# Altium PCB main.PcbDoc (part 6 of 8)
Units mil, origin at the board's own origin, x right, y up, seen from the top; angles counter-clockwise.
Board outline 3385.83 x 2362.2 mil, 8 copper layers (L1 (SIG), L2 (GND), L3 (SIG), L4 (GND), L5 (PWR), L6 (SIG), L7 (GND), L8 (SIG)), stack 46.958 mil thick; 318 components, 288 nets, 1482 pads, 1056 vias.
Unrouted connection lines stored in the file: 7.
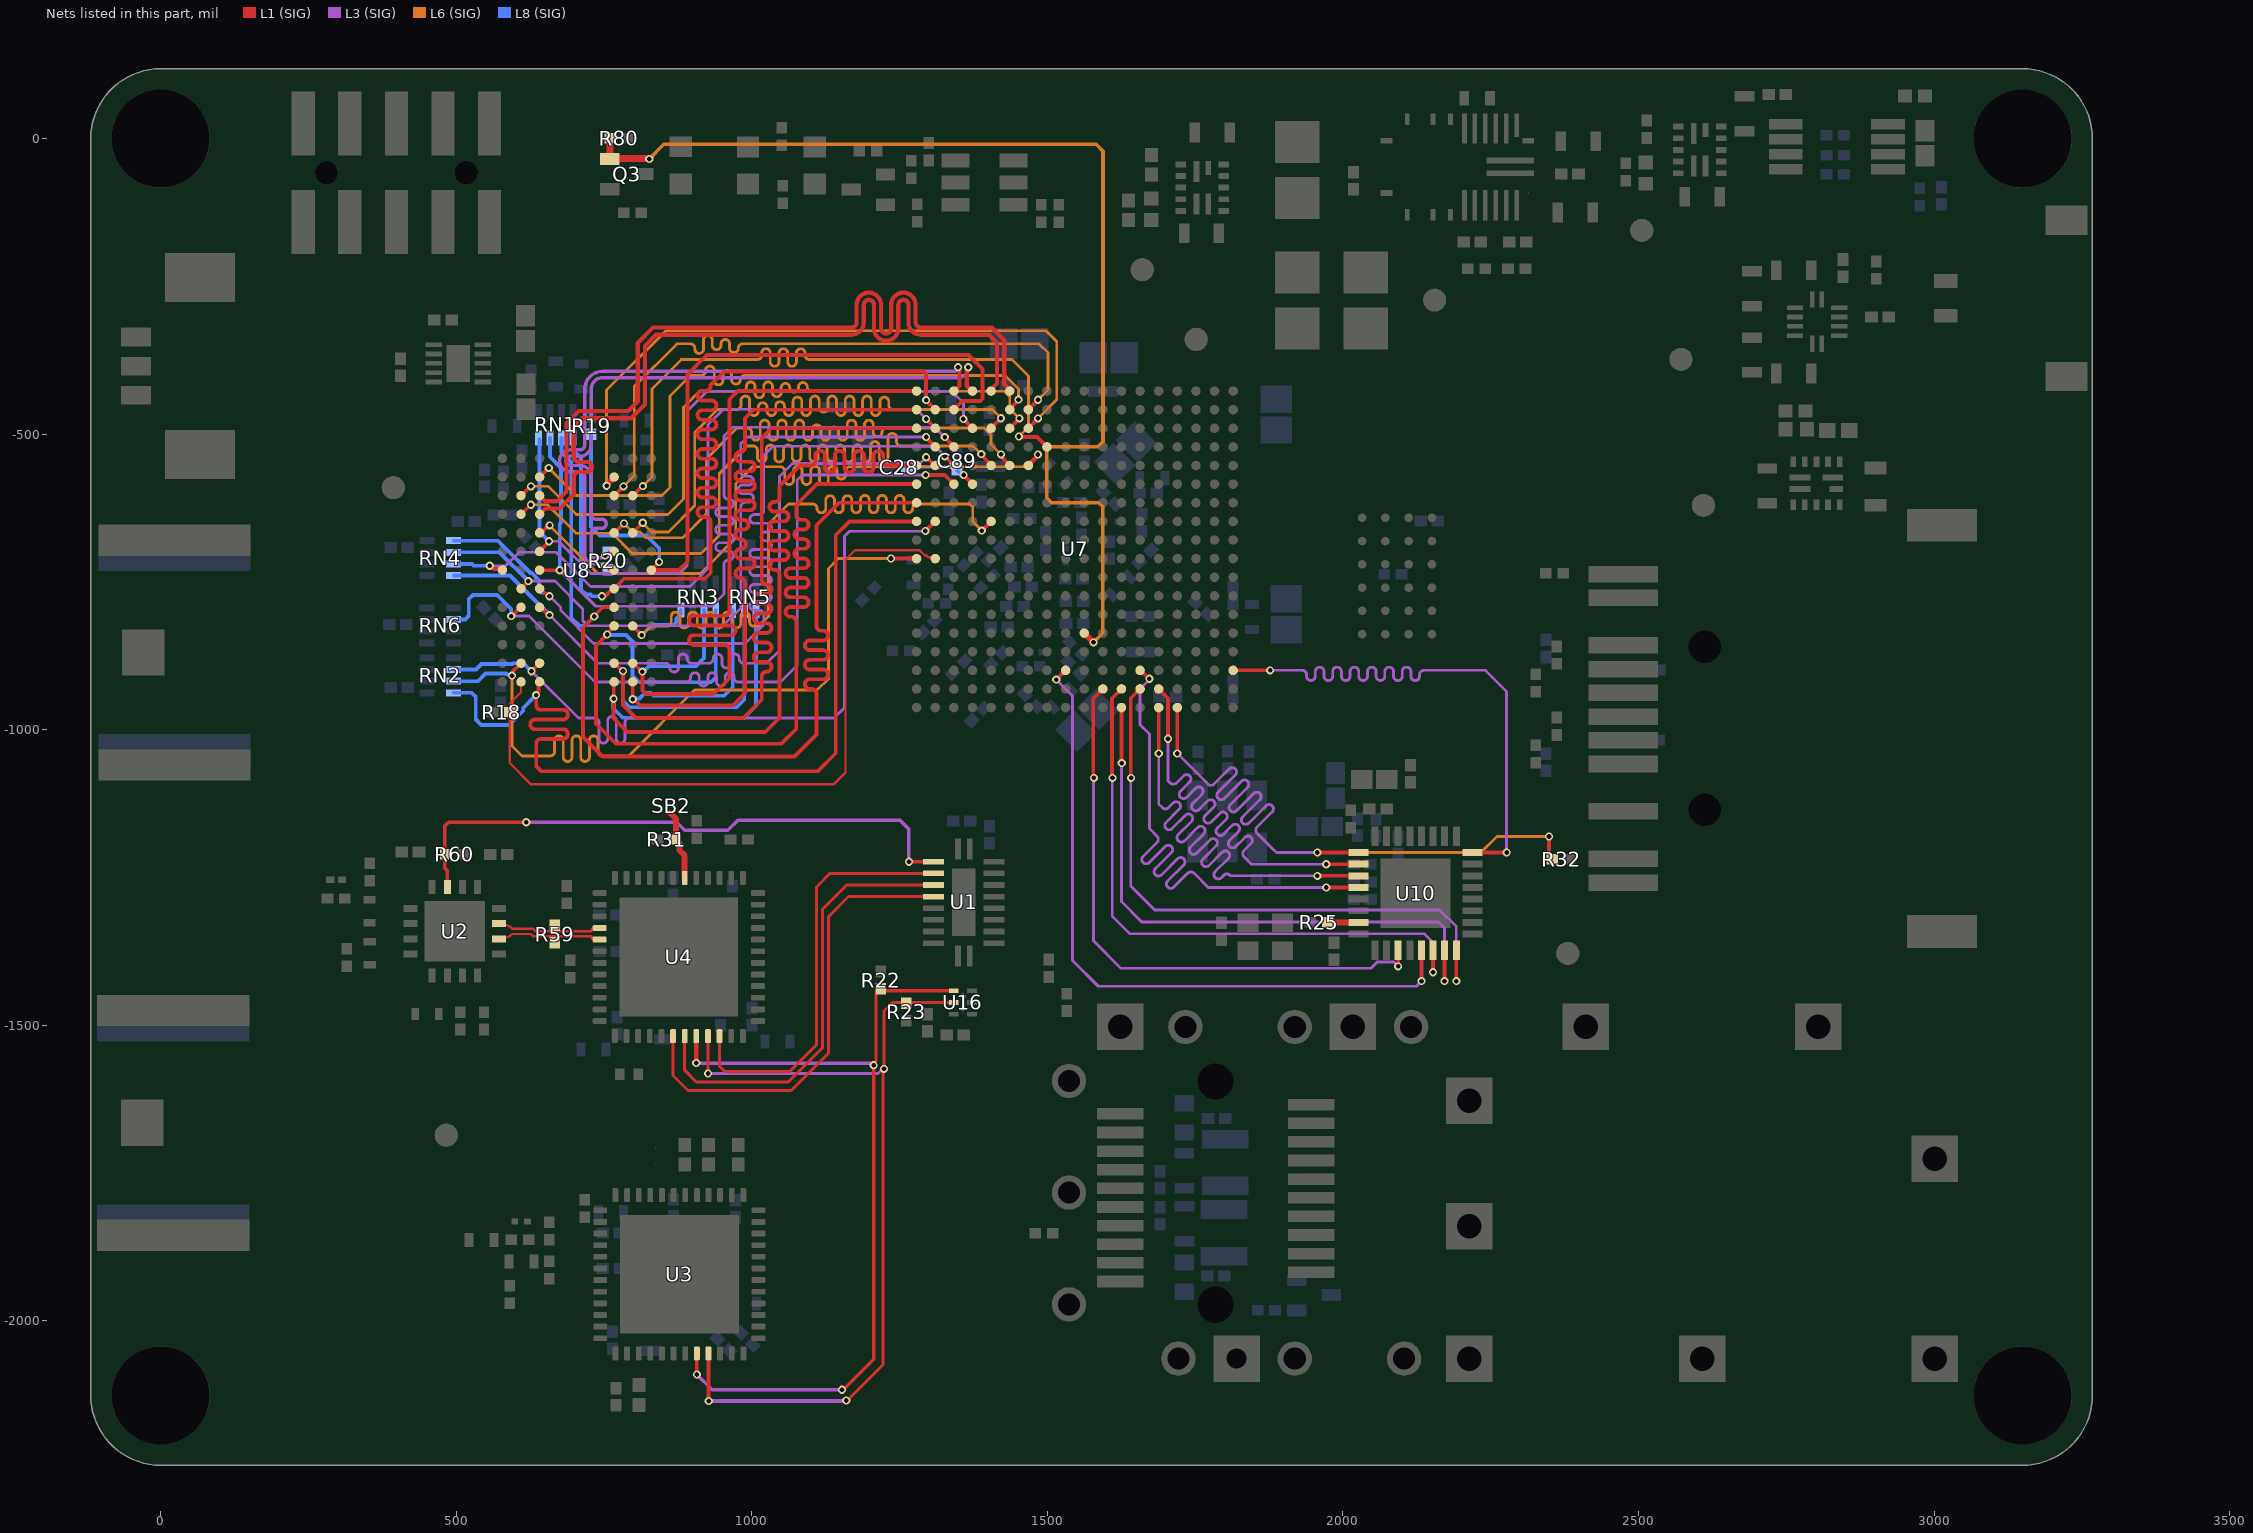
[diagram p10: the nets of this part, all layers, seen from the top]

## Via types
v1: diameter 13.78, hole 7.87, L1 (SIG) to L8 (SIG), tented both sides, 1033 vias
v2: diameter 13.78, hole 7.87, L1 (SIG) to L8 (SIG), 23 vias

## Nets (pads, with @x,y where several pads share a name; then routed paths per layer and width w, separated by ;. In a path a pad name is that pad's centre, name@x,y a point inside that pad or via, vN(x,y) a via of type N, cw(c..) or ccw(c..) an arc to the next point about the centre after c; other vN are vias at no path point) (continued)
DDR3_A6: RN3.6 U7.A1 U8.M8 | length 1469.4
  L1 (SIG) w6.41: U8.M8@798.62,-887.4 799.66,-887.4 813.94,-901.68 v1(814.98,-901.68) 814.98,-933.33 821.08,-939.43 935.8,-939.43 962.43,-912.8 962.43,-896.64 962.43,-864.62 ccw(c954.23,-864.62) 954.23,-856.42 902.25,-856.42 cw(c902.25,-848.21) 894.05,-848.21 cw(c902.25,-848.21) 902.25,-840.01 964.23,-840.01 ccw(c964.23,-831.8) 972.43,-831.8 ccw(c964.23,-831.8) 964.23,-823.6 902.25,-823.6 cw(c902.25,-815.39) 894.05,-815.39 cw(c902.25,-815.39) 902.25,-807.19 954.23,-807.19 ccw(c954.23,-798.98) 962.43,-798.98 962.43,-779.37 962.43,-441.07 976.47,-427.04 U7.A1@1278.88,-427.04
  L8 (SIG) w6.41: v1(814.98,-901.68) 816.97,-901.68 826.15,-892.51 905.55,-892.51 919.39,-878.67 RN3.6@919.39,-797.53
DDR3_A7: RN2.7 U7.K1 U8.M2 | length 1393.9
  L1 (SIG) w6.41: v1(594.4,-908.48) 595.81,-907.07 595.81,-901.23 U8.M2@609.64,-887.4 ; v1(1235.64,-710.44) 1235.71,-710.51 U7.K1@1278.88,-710.51
  L6 (SIG) w4.7: v1(594.4,-908.48) 594.4,-1027.19 611.43,-1044.23 628.83,-1044.23 659.16,-1044.23 ccw(c659.16,-1036.87) 666.51,-1036.87 666.51,-1017.74 cw(c673.86,-1017.74) 681.21,-1017.74 681.21,-1046.34 ccw(c688.57,-1046.34) 695.92,-1046.34 695.92,-1017.74 cw(c703.27,-1017.74) 710.62,-1017.74 710.62,-1046.34 ccw(c717.97,-1046.34) 725.32,-1046.34 725.32,-1017.74 cw(c732.67,-1017.74) 740.02,-1017.74 740.02,-1036.87 ccw(c747.38,-1036.87) 747.38,-1044.23 764.43,-1044.23 791.93,-1044.23 903.24,-932.91 1110.56,-932.91 1129.63,-913.85 1129.63,-727.04 1146.23,-710.44 v1(1235.64,-710.44)
  L8 (SIG) w6.41: RN2.7@495.7,-917.87 536.89,-917.87 549.8,-904.96 584.12,-904.96 586.23,-907.07 592.99,-907.07 v1(594.4,-908.48)
DDR3_A8: RN5.8 U7.B1 U8.N8 | length 1580.2
  L1 (SIG) w6.41: U8.N8@798.62,-918.9 798.7,-918.97 798.7,-948.29 v1(798.78,-948.37) 800.77,-948.37 811.36,-958.96 967.93,-958.96 988.79,-938.1 988.79,-754.82 988.79,-751.61 ccw(c980.58,-751.61) 980.58,-743.41 ; 980.55,-743.41 cw(c980.55,-735.2) 972.34,-735.2 cw(c980.55,-735.2) 980.55,-727 996.91,-727 ccw(c996.91,-718.79) 1005.12,-718.79 ccw(c996.91,-718.79) 996.91,-710.59 980.55,-710.59 cw(c980.55,-702.38) 972.34,-702.38 cw(c980.55,-702.38) 980.55,-694.18 981.5,-694.18 ccw(c981.5,-685.97) 989.71,-685.97 ccw(c981.5,-685.97) 981.5,-677.77 980.55,-677.77 cw(c980.55,-669.56) 972.34,-669.56 cw(c980.55,-669.56) 980.55,-661.36 986.14,-661.36 ccw(c986.14,-653.15) 994.35,-653.15 ccw(c986.14,-653.15) 986.14,-644.95 980.55,-644.95 cw(c980.55,-636.74) 972.34,-636.74 cw(c980.55,-636.74) 980.55,-628.54 996.91,-628.54 ccw(c996.91,-620.33) 1005.12,-620.33 ccw(c996.91,-620.33) 996.91,-612.13 980.55,-612.13 cw(c980.55,-603.92) 972.34,-603.92 cw(c980.55,-603.92) 980.55,-595.72 996.91,-595.72 ccw(c996.91,-587.51) 1005.12,-587.51 ccw(c996.91,-587.51) 996.91,-579.31 980.55,-579.31 cw(c980.55,-571.1) 972.34,-571.1 cw(c980.55,-571.1) 980.55,-562.89 996.91,-562.89 ccw(c996.91,-554.69) 1005.12,-554.69 ccw(c996.91,-554.69) 996.91,-546.48 980.55,-546.48 cw(c980.55,-538.28) 972.34,-538.28 cw(c980.55,-538.28) 980.55,-530.07 ; 980.58,-530.07 ccw(c980.58,-521.87) 988.79,-521.87 988.79,-484.73 988.79,-473.18 1003.43,-458.54 U7.B1@1278.88,-458.54
  L8 (SIG) w6.41: v1(798.78,-948.37) 800.19,-946.96 810.34,-946.96 819.79,-937.52 828.86,-937.52 833.76,-942.41 953.29,-942.41 967.74,-927.96 RN5.8@967.74,-798.09
DDR3_A9: RN2.6 U7.H2 U8.M3 | length 1334.8
  L1 (SIG) w6.41: v1(627.51,-901.03) U8.M3@641.14,-887.4 ; v1(1293.65,-663.79) 1293.88,-663.79 1310.15,-647.52 U7.H2@1310.37,-647.52
  L3 (SIG) w4.7: v1(627.51,-901.03) 706.73,-980.24 717.12,-980.24 734.17,-980.24 cw(c734.17,-987.59) 741.52,-987.59 741.52,-1015.33 ccw(c748.87,-1015.33) 756.22,-1015.33 756.22,-984.67 cw(c763.58,-984.67) 770.93,-984.67 770.93,-1015.33 ccw(c778.28,-1015.33) 785.63,-1015.33 785.63,-987.59 cw(c792.98,-987.59) 792.98,-980.24 816.21,-980.24 1139.33,-980.24 1156.84,-962.74 1156.84,-672.7 1165.3,-664.24 1293.2,-664.24 v1(1293.65,-663.79)
  L8 (SIG) w6.41: RN2.6@495.7,-898.19 533.37,-898.19 543,-888.55 595.03,-888.55 595.96,-887.62 614.11,-887.62 v1(627.51,-901.03)
DDR3_A10: RN1.5 U7.B2 U8.H7 | length 1591.3
  L1 (SIG) w6.41: v1(746.69,-774.06) 748.1,-772.65 753.35,-772.65 764.59,-761.41 U8.H7@767.12,-761.41 783.84,-744.69 920.43,-744.69 930.78,-734.35 930.78,-729.04 930.2,-728.46 930.2,-651.35 930.2,-648.14 ccw(c921.99,-648.14) 921.99,-639.94 916.5,-639.94 cw(c916.5,-631.73) 908.3,-631.73 cw(c916.5,-631.73) 916.5,-623.53 931.99,-623.53 ccw(c931.99,-615.32) 940.2,-615.32 ccw(c931.99,-615.32) 931.99,-607.12 916.5,-607.12 cw(c916.5,-598.91) 908.3,-598.91 cw(c916.5,-598.91) 916.5,-590.71 931.99,-590.71 ccw(c931.99,-582.5) 940.2,-582.5 ccw(c931.99,-582.5) 931.99,-574.3 916.5,-574.3 cw(c916.5,-566.09) 908.3,-566.09 cw(c916.5,-566.09) 916.5,-557.89 931.99,-557.89 ccw(c931.99,-549.68) 940.2,-549.68 ccw(c931.99,-549.68) 931.99,-541.48 916.5,-541.48 cw(c916.5,-533.27) 908.3,-533.27 cw(c916.5,-533.27) 916.5,-525.07 931.99,-525.07 ccw(c931.99,-516.86) 940.2,-516.86 ccw(c931.99,-516.86) 931.99,-508.66 916.5,-508.66 cw(c916.5,-500.45) 908.3,-500.45 cw(c916.5,-500.45) 916.5,-492.24 931.99,-492.24 ccw(c931.99,-484.04) 940.2,-484.04 ccw(c931.99,-484.04) 931.99,-475.83 916.5,-475.83 cw(c916.5,-467.63) 908.3,-467.63 cw(c916.5,-467.63) 916.5,-459.42 931.99,-459.42 ccw(c931.99,-451.22) 940.2,-451.22 ccw(c931.99,-451.22) 931.99,-443.01 916.5,-443.01 cw(c916.5,-434.81) 908.3,-434.81 cw(c916.5,-434.81) 916.5,-426.6 921.99,-426.6 ccw(c921.99,-418.4) 930.2,-418.4 930.2,-416.94 941.54,-405.6 953.39,-393.75 1290.97,-393.75 1294.72,-397.51 1294.72,-442.89 U7.B2@1310.37,-458.54
  L8 (SIG) w6.41: RN1.5@697.94,-506.68 697.94,-527.15 711.21,-540.41 711.21,-763.08 719.5,-771.35 726.98,-771.35 729.7,-774.06 v1(746.69,-774.06)
  other v1: 1294.95,-442.48
DDR3_A11: RN5.7 U7.C1 U8.M7 | length 1664.5
  L1 (SIG) w6.41: U8.M7@767.12,-887.4 768.03,-887.4 781.17,-900.53 v1(782.08,-900.53) 782.08,-958.21 804.2,-980.34 985.49,-980.34 1016.79,-949.03 1016.79,-923.64 1016.79,-909.98 cw(c1024.99,-909.98) 1024.99,-901.78 ; 1024.99,-754.09 cw(c1024.99,-745.88) 1016.79,-745.88 1016.79,-742.68 1016.79,-506.28 1033.04,-490.03 U7.C1@1278.88,-490.03 ; 1025.04,-901.78 ccw(c1025.04,-893.57) 1033.25,-893.57 ccw(c1025.04,-893.57) 1025.04,-885.37 1011.6,-885.37 cw(c1011.6,-877.16) 1003.39,-877.16 cw(c1011.6,-877.16) 1011.6,-868.96 1025.04,-868.96 ccw(c1025.04,-860.75) 1033.25,-860.75 ccw(c1025.04,-860.75) 1025.04,-852.55 1011.6,-852.55 cw(c1011.6,-844.34) 1003.39,-844.34 cw(c1011.6,-844.34) 1011.6,-836.14 1025.04,-836.14 ccw(c1025.04,-827.93) 1033.25,-827.93 ccw(c1025.04,-827.93) 1025.04,-819.73 1011.6,-819.73 cw(c1011.6,-811.52) 1003.39,-811.52 cw(c1011.6,-811.52) 1011.6,-803.32 1025.04,-803.32 ccw(c1025.04,-795.11) 1033.25,-795.11 ccw(c1025.04,-795.11) 1025.04,-786.91 1011.6,-786.91 cw(c1011.6,-778.7) 1003.39,-778.7 cw(c1011.6,-778.7) 1011.6,-770.5 1025.04,-770.5 ccw(c1025.04,-762.29) 1033.25,-762.29 ccw(c1025.04,-762.29) 1025.04,-754.09
  L8 (SIG) w6.41: v1(782.08,-900.53) 782.08,-950.9 793.14,-961.97 974.65,-961.97 987.43,-949.18 RN5.7@987.43,-798.09
DDR3_A12: RN3.5 U7.F1 U8.K7 | length 1759.6
  L1 (SIG) w6.41: U8.K7@767.12,-824.41 767.12,-825.81 755.38,-837.55 v1(755.38,-838.95) 736.34,-857.99 736.34,-989.97 769.88,-1023.5 1050.5,-1023.5 1075.12,-998.88 1075.12,-840.98 1075.12,-817.03 ccw(c1066.91,-817.03) 1066.91,-808.82 1065.46,-808.82 cw(c1065.46,-800.62) 1057.26,-800.62 cw(c1065.46,-800.62) 1065.46,-792.41 1088.01,-792.41 ccw(c1088.01,-784.21) 1096.22,-784.21 ccw(c1088.01,-784.21) 1088.01,-776 1065.46,-776 cw(c1065.46,-767.8) 1057.26,-767.8 cw(c1065.46,-767.8) 1065.46,-759.59 1088.01,-759.59 ccw(c1088.01,-751.39) 1096.22,-751.39 ccw(c1088.01,-751.39) 1088.01,-743.18 1065.46,-743.18 cw(c1065.46,-734.98) 1057.26,-734.98 cw(c1065.46,-734.98) 1065.46,-726.77 1088.01,-726.77 ccw(c1088.01,-718.57) 1096.22,-718.57 ccw(c1088.01,-718.57) 1088.01,-710.36 1080.37,-710.36 cw(c1080.37,-702.16) 1072.17,-702.16 cw(c1080.37,-702.16) 1080.37,-693.95 1088.01,-693.95 ccw(c1088.01,-685.75) 1096.22,-685.75 ccw(c1088.01,-685.75) 1088.01,-677.54 1080.37,-677.54 cw(c1080.37,-669.34) 1072.17,-669.34 cw(c1080.37,-669.34) 1080.37,-661.13 1088.01,-661.13 ccw(c1088.01,-652.93) 1096.22,-652.93 ccw(c1088.01,-652.93) 1088.01,-644.72 1083.32,-644.72 cw(c1083.32,-636.52) 1075.12,-636.52 1075.12,-633.31 1075.12,-619.94 1110.53,-584.52 U7.F1@1278.88,-584.52
  L8 (SIG) w6.41: v1(755.38,-838.95) 756.26,-839.83 787.31,-839.83 798.45,-850.96 798.45,-893.7 798.49,-893.74 798.49,-908.79 809.39,-919.7 931.19,-919.7 939.07,-911.82 RN3.5@939.07,-797.53
DDR3_A13: RN2.8 U7.H1 U8.N3 | length 1597.8
  L1 (SIG) w6.41: U8.N3@641.14,-918.9 639.28,-920.76 639.28,-935.49 635.29,-939.48 v1(635.29,-941.47) 635.29,-942.46 635.29,-958.05 ccw(c643.49,-958.05) 643.49,-966.26 680.73,-966.26 cw(c680.73,-974.46) 688.94,-974.46 cw(c680.73,-974.46) 680.73,-982.67 633.49,-982.67 ccw(c633.49,-990.87) 625.29,-990.87 ccw(c633.49,-990.87) 633.49,-999.08 680.73,-999.08 cw(c680.73,-1007.28) 688.94,-1007.28 cw(c680.73,-1007.28) 680.73,-1015.49 643.49,-1015.49 ccw(c643.49,-1023.69) 635.29,-1023.69 635.29,-1043.31 635.29,-1061.39 644.24,-1070.34 1111.32,-1070.34 1142,-1039.66 1142,-670.81 1165.3,-647.52 U7.H1@1278.88,-647.52
  L8 (SIG) w6.41: RN2.8@495.7,-937.56 526.35,-937.56 533.29,-944.49 533.29,-982.48 541.36,-990.55 ; 541.25,-990.67 542.44,-991.86 589.42,-991.86 613.37,-967.9 613.37,-963.38 v1(635.29,-941.47)
DDR3_A14: RN5.6 U7.E1 U8.N7 | length 1819
  L1 (SIG) w6.41: U8.N7@767.12,-918.9 766.71,-919.31 766.71,-947.23 v1(766.29,-947.65) 766.29,-980.57 789.57,-1003.86 1022.9,-1003.86 1046.95,-979.82 1046.95,-761.44 1046.95,-737.64 ccw(c1038.75,-737.64) 1038.75,-729.43 1038.17,-729.43 cw(c1038.17,-721.22) 1029.96,-721.22 cw(c1038.17,-721.22) 1038.17,-713.02 1054.05,-713.02 ccw(c1054.05,-704.81) 1062.26,-704.81 ccw(c1054.05,-704.81) 1054.05,-696.61 1038.17,-696.61 cw(c1038.17,-688.4) 1029.96,-688.4 cw(c1038.17,-688.4) 1038.17,-680.2 1054.05,-680.2 ccw(c1054.05,-671.99) 1062.26,-671.99 ccw(c1054.05,-671.99) 1054.05,-663.79 1038.17,-663.79 cw(c1038.17,-655.58) 1029.96,-655.58 cw(c1038.17,-655.58) 1038.17,-647.38 1054.05,-647.38 ccw(c1054.05,-639.17) 1062.26,-639.17 ccw(c1054.05,-639.17) 1054.05,-630.97 1038.17,-630.97 cw(c1038.17,-622.76) 1029.96,-622.76 cw(c1038.17,-622.76) 1038.17,-614.56 1038.75,-614.56 ccw(c1038.75,-606.35) 1046.95,-606.35 1046.95,-587.75 1047.97,-586.74 1081.68,-553.03 1096.17,-553.03 1099.37,-553.03 ccw(c1099.37,-544.82) 1107.58,-544.82 1107.58,-536.28 cw(c1115.78,-536.28) 1115.78,-528.07 cw(c1115.78,-536.28) 1123.99,-536.28 1123.99,-556.49 ccw(c1132.19,-556.49) 1132.19,-564.7 ccw(c1132.19,-556.49) 1140.4,-556.49 1140.4,-536.28 cw(c1148.6,-536.28) 1148.6,-528.07 cw(c1148.6,-536.28) 1156.81,-536.28 1156.81,-556.49 ccw(c1165.01,-556.49) 1165.01,-564.7 ccw(c1165.01,-556.49) 1173.22,-556.49 1173.22,-536.28 cw(c1181.42,-536.28) 1181.42,-528.07 cw(c1181.42,-536.28) 1189.63,-536.28 1189.63,-556.49 ccw(c1197.83,-556.49) 1197.83,-564.7 ccw(c1197.83,-556.49) 1206.04,-556.49 1206.04,-536.28 cw(c1214.24,-536.28) 1214.24,-528.07 cw(c1214.24,-536.28) 1222.45,-536.28 1222.45,-544.82 ccw(c1230.65,-544.82) 1230.65,-553.03 1252.64,-553.03 U7.E1@1278.88,-553.03
  L8 (SIG) w6.41: v1(766.29,-947.65) 766.29,-964.36 781.69,-979.76 986.75,-979.76 1007.11,-959.39 RN5.6@1007.11,-798.09
DDR3_A15: RN1.6 U7.G1 U8.J7 | length 1763.9
  L1 (SIG) w6.41: U8.J7@767.12,-792.91 747.98,-792.91 733.67,-807.22 v1(733.67,-808.39) 714.58,-827.48 714.58,-1012.23 747.78,-1045.43 1072.25,-1045.43 1109.4,-1008.28 1109.4,-966.82 1109.4,-939.13 ccw(c1101.19,-939.13) 1101.19,-930.93 1098,-930.93 cw(c1098,-922.72) 1089.8,-922.72 cw(c1098,-922.72) 1098,-914.52 1120.78,-914.52 ccw(c1120.78,-906.31) 1128.98,-906.31 ccw(c1120.78,-906.31) 1120.78,-898.11 1098,-898.11 cw(c1098,-889.9) 1089.8,-889.9 cw(c1098,-889.9) 1098,-881.7 1120.78,-881.7 ccw(c1120.78,-873.49) 1128.98,-873.49 ccw(c1120.78,-873.49) 1120.78,-865.29 1098,-865.29 cw(c1098,-857.08) 1089.8,-857.08 cw(c1098,-857.08) 1098,-848.88 1120.78,-848.88 ccw(c1120.78,-840.67) 1128.98,-840.67 ccw(c1120.78,-840.67) 1120.78,-832.47 1117.6,-832.47 cw(c1117.6,-824.26) 1109.4,-824.26 1109.4,-821.05 1109.4,-654.02 1147.4,-616.02 U7.G1@1278.88,-616.02
  L8 (SIG) w6.41: RN1.6@678.26,-506.68 678.26,-530.67 694.51,-546.92 694.51,-810.46 708.76,-824.71 717.35,-824.71 v1(733.67,-808.39)
DDR3_BA0: RN6.6 U7.F3 U8.J2 | length 1390
  L1 (SIG) w6.41: v1(593.19,-807.78) 593.99,-807.78 608.85,-792.91 U8.J2@609.64,-792.91 ; v1(1294.18,-569.08) 1326.43,-569.08 U7.F3@1341.87,-584.52
  L3 (SIG) w4.7: v1(593.19,-807.78) 623.02,-807.78 734.63,-919.39 886.72,-919.39 889.08,-919.39 ccw(c889.08,-912.03) 896.43,-912.03 896.43,-910.88 cw(c903.78,-910.88) 911.13,-910.88 911.13,-918.7 ccw(c918.48,-918.7) 925.83,-918.7 925.83,-910.88 cw(c933.18,-910.88) 940.53,-910.88 940.53,-918.7 ccw(c947.88,-918.7) 955.24,-918.7 955.24,-910.88 cw(c962.59,-910.88) 969.94,-910.88 969.94,-912.03 ccw(c977.29,-912.03) 977.29,-919.39 991.59,-919.39 1048.78,-919.39 1076.8,-891.36 1076.8,-577.83 1085.55,-569.08 v1(1294.18,-569.08)
  L8 (SIG) w6.41: RN6.6@495.74,-813.55 515.29,-813.55 521.11,-807.73 521.11,-779.33 528.53,-771.92 569.6,-771.92 593.19,-795.51 v1(593.19,-807.78)
DDR3_BA1: RN3.8 U7.H5 U8.K8 | length 1372
  L1 (SIG) w6.41: U8.K8@798.62,-824.41 798.62,-824.62 813.78,-839.78 v1(813.78,-840) ; v1(1389.12,-663.19) 1389.19,-663.19 U7.H5@1404.86,-647.52
  L6 (SIG) w4.7: v1(813.78,-840) 829.1,-824.68 854.06,-824.68 856.41,-824.68 ccw(c856.41,-817.33) 863.77,-817.33 863.77,-808.43 cw(c871.12,-808.43) 878.47,-808.43 878.47,-820.42 ccw(c885.82,-820.42) 893.17,-820.42 893.17,-808.43 cw(c900.52,-808.43) 907.87,-808.43 907.87,-820.42 ccw(c915.22,-820.42) 922.58,-820.42 922.58,-808.43 cw(c929.93,-808.43) 937.28,-808.43 937.28,-820.42 ccw(c944.63,-820.42) 951.98,-820.42 951.98,-808.21 cw(c959.33,-808.21) 966.68,-808.21 966.68,-820.42 ccw(c974.03,-820.42) 981.38,-820.42 981.38,-808.21 cw(c988.74,-808.21) 996.09,-808.21 996.09,-817.33 ccw(c1003.44,-817.33) 1003.44,-824.68 1011.69,-824.68 1015.64,-820.73 1028.09,-808.28 1028.09,-652.24 1062.22,-618.11 1086.02,-618.11 1103.08,-618.11 cw(c1103.08,-625.46) 1110.43,-625.46 1110.43,-625.64 ccw(c1117.78,-625.64) 1125.13,-625.64 1125.13,-611.41 cw(c1132.48,-611.41) 1139.83,-611.41 1139.83,-625.64 ccw(c1147.19,-625.64) 1154.54,-625.64 1154.54,-611.41 cw(c1161.89,-611.41) 1169.24,-611.41 1169.24,-625.64 ccw(c1176.59,-625.64) 1183.94,-625.64 1183.94,-610.96 cw(c1191.29,-610.96) 1198.64,-610.96 1198.64,-625.64 ccw(c1206,-625.64) 1213.35,-625.64 1213.35,-610.96 cw(c1220.7,-610.96) 1228.05,-610.96 1228.05,-625.64 ccw(c1235.4,-625.64) 1242.75,-625.64 1242.75,-610.96 cw(c1250.1,-610.96) 1257.45,-610.96 1257.45,-625.64 ccw(c1264.81,-625.64) 1272.16,-625.64 1272.16,-625.46 cw(c1279.51,-625.46) 1279.51,-618.11 1311.23,-618.11 1368.59,-618.11 1373.85,-623.37 1373.85,-647.91 v1(1389.12,-663.19)
  L8 (SIG) w6.41: v1(813.78,-840) 831.1,-822.68 868.02,-822.68 872.71,-817.99 872.71,-811.73 880.02,-804.42 RN3.8@880.02,-797.53
DDR3_BA2: RN4.8 U7.E2 U8.J3 | length 1315.1
  L1 (SIG) w6.41: U8.J3@641.14,-792.91 642.88,-792.91 656.1,-806.13 v1(657.84,-806.13) ; v1@1295.69,-539.09 1309.63,-553.03 U7.E2@1310.37,-553.03
  L3 (SIG) w4.7: v1(657.84,-806.13) 739.24,-887.53 836.93,-887.53 853.98,-887.53 cw(c853.98,-894.88) 861.34,-894.88 861.34,-895.05 ccw(c868.69,-895.05) 876.04,-895.05 876.04,-879.26 cw(c883.39,-879.26) 890.74,-879.26 890.74,-880.18 ccw(c898.09,-880.18) 898.09,-887.53 927.5,-887.53 ccw(c927.5,-880.18) 934.85,-880.18 934.85,-879.26 cw(c942.2,-879.26) 949.55,-879.26 949.55,-887.97 ccw(c956.9,-887.97) 964.25,-887.97 964.25,-879.26 cw(c971.6,-879.26) 978.95,-879.26 978.95,-880.18 ccw(c986.31,-880.18) 986.31,-887.53 1007.11,-887.53 1025.19,-887.53 1046.73,-865.99 1046.73,-571.28 1068.6,-549.41 1284.63,-549.41 v1(1294.95,-539.09)
  L8 (SIG) w6.41: RN4.8@495.79,-739.26 590.96,-739.26 v1(657.84,-806.13)
DDR3_CAS: RN1.7 U7.D3 U8.G3 | length 1415.8
  L1 (SIG) w6.41: U8.G3@641.32,-730.09 v1(675.23,-730.09) ; v1(1326.34,-505.08) 1326.34,-505.54 1341.87,-521.07 U7.D3@1341.87,-521.53
  L3 (SIG) w4.7: v1(675.23,-730.09) 736.16,-791.02 932.15,-791.02 953,-770.17 953,-737.33 953,-720.27 cw(c960.36,-720.27) 960.36,-712.92 961.67,-712.92 ccw(c961.67,-705.57) 961.67,-698.22 946.34,-698.22 cw(c946.34,-690.87) 946.34,-683.52 961.67,-683.52 ccw(c961.67,-676.16) 961.67,-668.81 946.34,-668.81 cw(c946.34,-661.46) 946.34,-654.11 961.67,-654.11 ccw(c961.67,-646.76) 961.67,-639.41 946.34,-639.41 cw(c946.34,-632.06) 946.34,-624.71 961.67,-624.71 ccw(c961.67,-617.36) 961.67,-610 960.36,-610 cw(c960.36,-602.65) 953,-602.65 953,-590.21 953,-503.25 967.95,-488.3 1309.56,-488.3 v1(1326.34,-505.08)
  L8 (SIG) w6.41: RN1.7@658.57,-506.68 658.57,-538.23 677.49,-557.15 677.49,-649.86 675.23,-652.12 v1(675.23,-730.09)
DDR3_CKE0: R19.2 U7.B3 U8.G9 | length 1341.8
  L1 (SIG) w6.41: v1(843.39,-716.22) 843.39,-716.43 830.12,-729.71 U8.G9@830.12,-729.92 876.96,-729.92 891.07,-715.81 891.07,-399 923.99,-366.08 924.24,-366.08 1006.13,-366.08 1366.58,-366.08 1390.36,-389.86 1390.36,-420.65 1390.09,-420.92 1390.09,-440.09 1386.33,-443.84 1379.57,-443.84 1379.49,-443.76 1367.25,-443.76 1367.16,-443.84 1355.94,-443.84 1341.87,-457.92 U7.B3@1341.87,-458.54
  L8 (SIG) w6.41: R19.2@728.14,-500.44 728.14,-656.59 742.9,-671.35 821.5,-671.35 843.39,-693.25 v1(843.39,-716.22)
DDR3_CLK0_N: R20.2 U7.A3 U8.G7 | length 1103.8
  L1 (SIG) w7.11: v1(751.95,-722.81) 753.76,-722.81 759.14,-728.19 765.39,-728.19 U8.G7@767.12,-729.92 ; U7.A3@1341.87,-427.04 1342.88,-427.04 1351.56,-418.36 1351.56,-407.46 1351.56,-394.08 1350.25,-392.77 1350.25,-388.05 v1(1348.98,-386.77)
  L3 (SIG) w5.77: v1(751.95,-722.81) 749.79,-722.81 746.53,-719.55 738.68,-719.55 733.52,-719.55 cw(c733.52,-703.48) 717.44,-703.48 717.44,-579.97 717.45,-571.71 ccw(c709.56,-571.71) 709.56,-563.82 693.48,-563.82 cw(c693.48,-545.17) 674.83,-545.17 cw(c693.48,-545.17) 693.48,-526.52 709.56,-526.52 ccw(c709.56,-518.64) 717.45,-518.64 717.45,-474.89 717.44,-424.06 cw(c747.84,-424.06) 747.84,-393.67 1342.09,-393.67 ccw(c1342.09,-386.77) v1(1348.98,-386.77)
DDR3_CLK0_P: R20.1 U7.A4 U8.F7 | length 1131.2
  L1 (SIG) w7.11: v1(751.95,-705.53) 753.76,-705.53 759.14,-700.15 765.39,-700.15 U8.F7@767.12,-698.42 ; v1(1366.26,-386.77) 1364.98,-388.05 1364.98,-392.77 1363.67,-394.08 1363.67,-412.48 1363.67,-418.36 1372.35,-427.04 U7.A4@1373.37,-427.04
  L3 (SIG) w5.77: v1(751.95,-705.53) 749.79,-705.53 746.53,-708.79 734.22,-708.79 733.52,-708.79 cw(c733.52,-703.48) 728.21,-703.48 728.21,-685.9 728.21,-667.25 cw(c736.09,-667.25) 736.09,-659.36 746.02,-659.36 ccw(c746.02,-651.48) 753.9,-651.48 ccw(c746.02,-651.48) 746.02,-643.6 736.09,-643.6 cw(c736.09,-635.71) 728.21,-635.71 728.21,-621.96 728.21,-579.97 728.21,-571.71 ccw(c709.56,-571.71) 709.56,-553.06 693.48,-553.06 cw(c693.48,-545.17) 685.6,-545.17 cw(c693.48,-545.17) 693.48,-537.29 709.56,-537.29 ccw(c709.56,-518.64) 728.21,-518.64 728.21,-474.89 728.21,-424.06 cw(c747.84,-424.06) 747.84,-404.43 1348.6,-404.43 ccw(c1348.6,-386.77) v1(1366.26,-386.77)
DDR3_D0: U7.C5 U8.E8 | length 1224
  L1 (SIG) w6.41: U8.E8@798.62,-666.93 798.62,-666.83 815.64,-649.81 v1(815.64,-649.72) ; U7.C5@1404.86,-490.03 1404.86,-489.79 1421.45,-473.21 v1(1421.45,-472.96)
  L6 (SIG) w4.7: v1(815.64,-649.72) 815.64,-650.5 822.15,-657.01 822.15,-657.1 830.31,-665.26 859.27,-665.26 903.55,-620.98 903.55,-497.07 942.27,-458.36 972.01,-458.36 974.36,-458.36 ccw(c974.36,-451.01) 981.71,-451.01 981.71,-442.9 cw(c989.06,-442.9) 996.41,-442.9 996.41,-461.09 ccw(c1003.76,-461.09) 1011.11,-461.09 1011.11,-454.1 cw(c1018.46,-454.1) 1025.82,-454.1 1025.82,-461.09 ccw(c1033.17,-461.09) 1040.52,-461.09 1040.52,-452.38 cw(c1047.87,-452.38) 1055.22,-452.38 1055.22,-461.09 ccw(c1062.57,-461.09) 1069.92,-461.09 1069.92,-444.69 cw(c1077.27,-444.69) 1084.63,-444.69 1084.63,-461.09 ccw(c1091.98,-461.09) 1099.33,-461.09 1099.33,-442.9 cw(c1106.68,-442.9) 1114.03,-442.9 1114.03,-455.47 ccw(c1121.38,-455.47) 1128.73,-455.47 1128.73,-442.9 cw(c1136.08,-442.9) 1143.43,-442.9 1143.43,-461.09 ccw(c1150.79,-461.09) 1158.14,-461.09 1158.14,-442.9 cw(c1165.49,-442.9) 1172.84,-442.9 1172.84,-461.09 ccw(c1180.19,-461.09) 1187.54,-461.09 1187.54,-442.9 cw(c1194.89,-442.9) 1202.24,-442.9 1202.24,-461.09 ccw(c1209.6,-461.09) 1216.95,-461.09 1216.95,-444.64 cw(c1224.3,-444.64) 1231.65,-444.64 1231.65,-451.01 ccw(c1239,-451.01) 1239,-458.36 1256.19,-458.36 1406.84,-458.36 v1(1421.45,-472.96)
DDR3_D1: U7.E7 U8.E3 | length 1219.7
  L1 (SIG) w6.41: U8.E3@641.14,-666.93 643.45,-666.93 656.17,-654.2 v1(658.17,-654.2) ; U7.E7@1467.85,-553.03 1482.52,-538.36 1482.52,-537.83 1483.93,-536.42 v1(1483.93,-534.42)
  L6 (SIG) w4.7: v1(658.17,-654.2) 739.52,-735.55 913.24,-735.55 972.73,-676.06 972.73,-584.06 1001.59,-555.19 1031.4,-555.19 1048.45,-555.19 cw(c1048.45,-562.54) 1055.8,-562.54 1055.8,-577.89 ccw(c1063.15,-577.89) 1070.5,-577.89 1070.5,-561.84 cw(c1077.86,-561.84) 1085.21,-561.84 1085.21,-577.89 ccw(c1092.56,-577.89) 1099.91,-577.89 1099.91,-561.85 cw(c1107.26,-561.85) 1114.61,-561.85 1114.61,-577.89 ccw(c1121.96,-577.89) 1129.31,-577.89 1129.31,-561.88 cw(c1136.66,-561.88) 1144.02,-561.88 1144.02,-568.6 ccw(c1151.37,-568.6) 1158.72,-568.6 1158.72,-562.54 cw(c1166.07,-562.54) 1166.07,-555.19 1203.64,-555.19 1463.16,-555.19 v1(1483.93,-534.42)
DDR3_D2: U7.E6 U8.E7 | length 1220.4
  L1 (SIG) w6.41: U8.E7@767.12,-666.93 767.51,-666.93 783.4,-651.04 v1(783.79,-651.04) ; v1(1421.65,-534.14) 1423.06,-535.55 1423.06,-539.73 U7.E6@1436.36,-553.03
  L6 (SIG) w4.7: v1(783.79,-651.04) 798.01,-665.27 810.91,-665.27 821.03,-675.39 882.53,-675.39 922.98,-634.95 922.98,-541.95 975.27,-489.65 992.33,-489.65 cw(c992.33,-497.01) 999.68,-497.01 999.68,-502.92 ccw(c1007.03,-502.92) 1014.38,-502.92 1014.38,-483.47 cw(c1021.73,-483.47) 1029.08,-483.47 1029.08,-502.92 ccw(c1036.43,-502.92) 1043.78,-502.92 1043.78,-483.5 cw(c1051.14,-483.5) 1058.49,-483.5 1058.49,-502.92 ccw(c1065.84,-502.92) 1073.19,-502.92 1073.19,-483.54 cw(c1080.54,-483.54) 1087.89,-483.54 1087.89,-502.92 ccw(c1095.24,-502.92) 1102.59,-502.92 1102.59,-491.8 cw(c1109.95,-491.8) 1117.3,-491.8 1117.3,-502.92 ccw(c1124.65,-502.92) 1132,-502.92 1132,-495.35 cw(c1139.35,-495.35) 1146.7,-495.35 1146.7,-502.92 ccw(c1154.05,-502.92) 1161.4,-502.92 1161.4,-483.66 cw(c1168.76,-483.66) 1176.11,-483.66 1176.11,-502.92 ccw(c1183.46,-502.92) 1190.81,-502.92 1190.81,-483.7 cw(c1198.16,-483.7) 1205.51,-483.7 1205.51,-497.01 ccw(c1212.86,-497.01) 1220.21,-497.01 cw(c1227.56,-497.01) 1227.56,-489.65 1253.22,-489.65 1393,-489.65 1404.74,-501.4 1404.74,-517.23 v1(1421.65,-534.14)
DDR3_D3: U7.B7 U8.C7 | length 1130.7
  L1 (SIG) w6.41: U8.C7@767.12,-603.93 767.29,-603.93 782.92,-588.31 v1(783.09,-588.31) ; U7.B7@1467.85,-458.54 v1@1484.12,-442.27
  L6 (SIG) w4.7: v1(783.09,-588.31) 801.21,-570.19 801.21,-419.55 873.55,-347.21 879.32,-347.21 896.37,-347.21 cw(c896.37,-354.56) 903.73,-354.56 903.73,-356.05 ccw(c911.08,-356.05) 918.43,-356.05 918.43,-340.57 cw(c925.78,-340.57) 933.13,-340.57 933.13,-349.76 ccw(c940.48,-349.76) 947.83,-349.76 947.83,-347.21 cw(c955.18,-347.21) 962.53,-347.21 962.53,-354.57 ccw(c969.89,-354.57) 977.24,-354.57 cw(c984.59,-354.56) 984.59,-347.21 1016.34,-347.21 1486.18,-347.21 1500.89,-361.92 1500.89,-425.01 v1(1484.12,-441.78)
DDR3_D4: U7.E5 U8.D2 | length 1384
  L1 (SIG) w6.41: U8.D2@609.64,-635.43 610.05,-635.43 626.04,-619.44 v1(626.44,-619.44) ; v1(1388.08,-533.79) 1388.08,-535.02 1404.86,-551.8 U7.E5@1404.86,-553.03
  L6 (SIG) w4.7: v1(626.44,-619.44) 654.81,-619.44 702.82,-667.45 763.32,-667.45 797.84,-701.97 914.36,-701.97 945.07,-671.25 945.07,-566.97 989,-523.04 991.9,-520.14 1002.38,-520.14 cw(c1002.38,-527.49) 1009.73,-527.49 1009.73,-539.64 ccw(c1017.08,-539.64) 1024.43,-539.64 1024.43,-525.82 cw(c1031.78,-525.82) 1039.14,-525.82 1039.14,-539.64 ccw(c1046.49,-539.64) 1053.84,-539.64 1053.84,-525.82 cw(c1061.19,-525.82) 1068.54,-525.82 1068.54,-538.94 ccw(c1075.89,-538.94) 1083.24,-538.94 1083.24,-525.82 cw(c1090.59,-525.82) 1097.94,-525.82 1097.94,-538.95 ccw(c1105.3,-538.95) 1112.65,-538.95 1112.65,-525.82 cw(c1120,-525.82) 1127.35,-525.82 1127.35,-538.97 ccw(c1134.7,-538.97) 1142.05,-538.97 1142.05,-525.82 cw(c1149.4,-525.82) 1156.75,-525.82 1156.75,-539.64 ccw(c1164.11,-539.64) 1171.46,-539.64 1171.46,-525.82 cw(c1178.81,-525.82) 1186.16,-525.82 1186.16,-539.64 ccw(c1193.51,-539.64) 1200.86,-539.64 1200.86,-519.91 cw(c1208.21,-519.91) 1215.56,-519.91 1215.56,-539.64 ccw(c1222.92,-539.64) 1230.27,-539.64 1230.27,-505.9 cw(c1237.62,-505.9) 1244.97,-505.9 1244.97,-512.79 ccw(c1252.32,-512.79) 1252.32,-520.14 1290.24,-520.14 1374.43,-520.14 v1(1388.08,-533.79)
DDR3_D5: U7.C6 U8.C2 | length 1214.1
  L1 (SIG) w6.41: U8.C2@609.64,-603.93 610.28,-603.93 625.98,-588.24 v1(626.62,-588.24) ; U7.C6@1436.36,-490.03 v1@1452.63,-473.76
  L6 (SIG) w4.7: v1(626.62,-588.24) 655.88,-588.24 703.3,-635.67 858.42,-635.67 884.33,-609.75 884.33,-454.62 911.61,-427.35 981.17,-427.35 983.52,-427.35 ccw(c983.52,-420) 990.87,-420 990.87,-418.99 cw(c998.22,-418.99) 1005.57,-418.99 1005.57,-431.2 ccw(c1012.93,-431.2) 1020.28,-431.2 1020.28,-418.99 cw(c1027.63,-418.99) 1034.98,-418.99 1034.98,-429.48 ccw(c1042.33,-429.48) 1049.68,-429.48 1049.68,-421.28 cw(c1057.03,-421.28) 1064.38,-421.28 1064.38,-421.78 ccw(c1071.74,-421.78) 1079.09,-421.78 1079.09,-419.99 cw(c1086.44,-419.99) 1093.79,-419.99 ccw(c1101.14,-420) 1101.14,-427.35 1119.03,-427.35 1427.5,-427.35 1436.28,-436.13 1436.28,-456.93 v1(1452.63,-473.28)
DDR3_D6: U7.D8 U8.C8 | length 1145.2
  L1 (SIG) w6.41: U8.C8@798.62,-603.93 799.16,-603.93 815.19,-587.91 v1(815.74,-587.91) ; v1(1451.88,-503.9) 1452.79,-504.81 1482.63,-504.81 U7.D8@1499.35,-521.53
  L6 (SIG) w4.7: v1(815.74,-587.91) 831.03,-572.62 831.03,-423.64 880.86,-373.8 1006.93,-373.8 1009.29,-373.8 ccw(c1009.29,-366.45) 1016.64,-366.45 1016.64,-362.77 cw(c1023.99,-362.77) 1031.34,-362.77 1031.34,-377.82 ccw(c1038.69,-377.82) 1046.04,-377.82 1046.04,-362.77 cw(c1053.39,-362.77) 1060.74,-362.77 1060.74,-377.82 ccw(c1068.1,-377.82) 1075.45,-377.82 1075.45,-362.77 cw(c1082.8,-362.77) 1090.15,-362.77 1090.15,-366.45 ccw(c1097.5,-366.45) 1097.5,-373.8 1122.02,-373.8 1440.07,-373.8 1468.17,-401.91 1468.17,-487.61 v1(1451.88,-503.9)
DDR3_D7: U7.B6 U8.B3 | length 1139.1
  L1 (SIG) w6.41: U8.B3@641.14,-572.44 641.23,-572.44 656.6,-557.07 v1(656.69,-557.07) ; U7.B6@1436.36,-458.54 1436.36,-457.47 1451.25,-442.58 v1(1451.25,-441.51)
  L6 (SIG) w4.7: v1(656.69,-557.07) 703.13,-603.51 848.26,-603.51 861.69,-590.08 861.69,-435.38 896.37,-400.7 912.08,-400.7 914.43,-400.7 ccw(c914.43,-393.35) 921.78,-393.35 921.78,-392.09 cw(c929.13,-392.09) 936.49,-392.09 936.49,-409.26 ccw(c943.84,-409.26) 951.19,-409.26 951.19,-399.69 cw(c958.54,-399.69) 965.89,-399.69 965.89,-408.05 ccw(c973.24,-408.05) 980.59,-408.05 cw(c987.94,-408.05) 987.94,-400.7 1000.6,-400.7 1428.07,-400.7 1451.25,-423.88 v1(1451.25,-441.51)
DDR3_DM: U7.C7 U8.B7 | length 1159
  L1 (SIG) w6.41: v1(754.45,-587.32) v1@754.45,-586.21 ; U8.B7@767.12,-573.54 U8.B7@767.12,-572.44 ; U7.C7@1467.85,-490.03 v1@1484.12,-473.76
  L1 (SIG) w9.75: v1@754.45,-586.21 U8.B7@767.12,-573.54
  L6 (SIG) w4.7: v1(754.45,-587.32) 754.45,-425.35 854.78,-325.02 1497.83,-325.02 1515.93,-343.11 1515.93,-441.48 v1(1484.12,-473.28)
DDR3_DQS0_N: U7.A5 U8.D3 | length 1369.5
  L1 (SIG) w7.11: U8.D3@641.14,-635.43 650.84,-625.74 675.32,-625.74 698.9,-602.15 698.9,-593.22 698.9,-572.56 cw(c707.46,-572.56) 707.46,-564 721.09,-564 ccw(c721.09,-555.45) 729.65,-555.45 ccw(c721.09,-555.45) 721.09,-546.9 707.46,-546.9 cw(c707.46,-538.35) 698.9,-538.35 698.9,-517.66 698.9,-486.54 712.51,-472.93 796.1,-472.93 819.22,-449.8 819.22,-350.69 838.17,-331.75 1159.25,-331.75 1168.85,-331.75 ccw(c1168.85,-311.09) 1189.51,-311.09 1189.51,-281.27 cw(c1198.06,-281.27) 1198.06,-272.71 cw(c1198.06,-281.27) 1206.62,-281.27 1206.62,-321.09 ccw(c1227.27,-321.09) 1227.27,-341.75 ccw(c1227.27,-321.09) 1247.93,-321.09 1247.93,-281.27 cw(c1256.48,-281.27) 1256.48,-272.71 cw(c1256.48,-281.27) 1265.04,-281.27 1265.04,-311.09 ccw(c1285.7,-311.09) 1285.7,-331.75 1321.05,-331.75 1400.98,-331.75 1415.03,-345.79 1415.03,-414.43 1404.86,-424.6 U7.A5@1404.86,-427.04
DDR3_DQS0_P: U7.A6 U8.C3 | length 1342.4
  L1 (SIG) w7.11: U8.C3@641.14,-603.93 650.84,-613.63 670.3,-613.63 686.8,-597.13 686.8,-481.52 707.5,-460.82 791.08,-460.82 807.12,-444.79 807.12,-345.68 833.15,-319.64 1159.25,-319.64 1168.85,-319.64 ccw(c1168.85,-311.09) 1177.41,-311.09 1177.41,-281.27 cw(c1198.06,-281.27) 1198.06,-260.61 cw(c1198.06,-281.27) 1218.72,-281.27 1218.72,-321.09 ccw(c1227.27,-321.09) 1227.27,-329.64 ccw(c1227.27,-321.09) 1235.83,-321.09 1235.83,-281.27 cw(c1256.48,-281.27) 1256.48,-260.61 cw(c1256.48,-281.27) 1277.14,-281.27 1277.14,-311.09 ccw(c1285.7,-311.09) 1285.7,-319.64 1321.05,-319.64 1405.99,-319.64 1427.13,-340.78 1427.13,-415.37 1436.36,-424.6 U7.A6@1436.36,-427.04
DDR3_ODT0: RN4.7 U7.C2 U8.G1 | length 1150.1
  L1 (SIG) w6.41: v1(556.75,-722.58) 558.75,-722.58 564.22,-728.06 576.29,-728.06 U8.G1@578.15,-729.92 ; v1(1294.95,-474.29) 1294.95,-474.45 1310.37,-489.87 U7.C2@1310.37,-490.03
  L3 (SIG) w4.7: v1(556.75,-722.58) 583.37,-722.58 606.08,-699.87 669.31,-699.87 727.13,-757.69 895.39,-757.69 926.04,-727.04 926.04,-483.72 951.92,-457.84 1278.5,-457.84 v1(1294.95,-474.29)
  L8 (SIG) w6.41: RN4.7@499.62,-719.78 499.82,-719.57 526.51,-719.57 529.52,-722.58 v1(556.75,-722.58)
DDR3_PLLCLK: C28.2 C89.2 U7.F4 | length 126.2
  L1 (SIG) w6.41: v1@1359.22,-569.26 1359.22,-570.17 1373.37,-584.32 U7.F4@1373.37,-584.52
  L8 (SIG) w6.41: C28.2@1260.94,-554.62 1261.5,-555.19 1342.9,-555.19 C89.2@1346.78,-559.07 1346.78,-560.39 1354.1,-567.71 1356.81,-567.71 v1@1358.93,-569.83
  other v1: 1358.36,-569.12
DDR3_RAS: RN1.8 U7.C4 U8.F3 | length 1264.4
  L1 (SIG) w6.41: U8.F3@641.14,-698.42 641.14,-697.78 657.09,-681.84 v1(657.09,-681.2) ; v1@1357.94,-474.61 U7.C4@1373.37,-490.03
  L3 (SIG) w4.7: v1(657.09,-681.2) 673.41,-681.2 727.76,-735.55 772.34,-735.55 772.48,-735.42 877.77,-735.42 890.91,-722.28 890.91,-460.79 924.35,-427.35 1338.07,-427.35 1357.94,-447.22 v1(1357.94,-474.29)
  L8 (SIG) w6.41: RN1.8@640.8,-508.82 640.8,-665.2 656.79,-681.2 v1(657.09,-681.2)
DDR3_RESET: R18.2 U7.K2 U8.N2 | length 1260.6
  L1 (SIG) w4: R18.2@590.56,-970.14 590.56,-1056.28 626.72,-1092.45 1138.46,-1092.45 1158.56,-1072.35 1158.56,-712.4 1174.53,-696.43 1283.99,-696.43 1292.52,-704.96 1294.95,-704.96 1298.18,-708.18 1308.05,-708.18 U7.K2@1310.37,-710.51 ; R18.2@591.01,-970.14 591.01,-955.11 609.64,-936.48 U8.N2@609.64,-918.9
DDR3_S0: RN4.6 U7.D2 U8.H2 | length 1267.8
  L1 (SIG) w6.41: U8.H2@609.64,-761.42 609.64,-761.29 622.22,-748.71 v1(622.22,-748.58) ; v1(1294.95,-504.71) 1294.95,-505.41 1310.37,-520.83 U7.D2@1310.37,-521.53
  L3 (SIG) w4.7: v1(622.22,-748.58) 667.23,-748.58 714.07,-795.42 714.07,-815.59 722.43,-823.95 951.53,-823.95 981.5,-793.98 981.5,-639.72 981.5,-622.67 cw(c988.85,-622.67) 988.85,-615.31 995.4,-615.31 ccw(c995.4,-607.96) 995.4,-600.61 984.33,-600.61 cw(c984.33,-593.26) 984.33,-585.91 995.4,-585.91 ccw(c995.4,-578.56) 995.4,-571.21 988.85,-571.21 cw(c988.85,-563.86) 981.5,-563.86 981.5,-553.81 981.5,-515.58 992.37,-504.71 v1(1294.95,-504.71)
  L8 (SIG) w6.41: RN4.6@495.79,-699.89 573.52,-699.89 v1(622.22,-748.58)
DDR3_WE: RN4.5 U7.E3 U8.H3 | length 1572.1
  L1 (SIG) w6.41: U8.H3@641.14,-761.41 643.21,-761.41 655.84,-774.05 v1(657.84,-774.05) ; v1(1326.45,-537.28) 1326.45,-537.45 1341.87,-552.87 U7.E3@1341.87,-553.03
  L3 (SIG) w4.7: v1(657.84,-774.05) 677,-793.21 677,-798.58 732.57,-854.15 988.39,-854.15 1020.27,-822.27 1020.27,-807.54 1020.27,-805.19 ccw(c1012.92,-805.19) 1012.92,-797.83 1004.02,-797.83 cw(c1004.02,-790.48) 1004.02,-783.13 1025.99,-783.13 ccw(c1025.99,-775.78) 1025.99,-768.43 1004.02,-768.43 cw(c1004.02,-761.08) 1004.02,-753.73 1025.99,-753.73 ccw(c1025.99,-746.38) 1025.99,-739.02 1004.02,-739.02 cw(c1004.02,-731.67) 1004.02,-724.32 1025.99,-724.32 ccw(c1025.99,-716.97) 1025.99,-709.62 1004.02,-709.62 cw(c1004.02,-702.27) 1004.02,-694.92 1025.99,-694.92 ccw(c1025.99,-687.57) 1025.99,-680.21 1023.14,-680.21 cw(c1023.14,-672.86) 1023.14,-665.51 1025.99,-665.51 ccw(c1025.99,-658.16) 1025.99,-650.81 1004.02,-650.81 cw(c1004.02,-643.46) 1004.02,-636.11 1012.92,-636.11 ccw(c1012.92,-628.76) 1020.27,-628.76 1020.27,-612.81 1020.27,-536.31 1036.06,-520.52 1309.69,-520.52 v1(1326.45,-537.28)
  L8 (SIG) w6.41: RN4.5@495.79,-680.2 570.58,-680.2 579.44,-689.06 ; 579.51,-688.99 625.5,-734.99 627.85,-734.99 640.14,-747.28 640.14,-763.88 644.37,-768.11 649.9,-768.11 655.84,-774.05 v1(657.84,-774.05)
DES_CS: U1.3 U4.34 | length 712
  L1 (SIG) w5: U4.34@945.58,-1518.3 945.58,-1569.31 954.66,-1578.38 1063.79,-1578.38 1109.51,-1532.67 1109.51,-1265.9 1132.53,-1242.87 U1.3@1307.57,-1242.87
DES_DVB_ASI: R31.1 SB2.2 U4.6 | length 120.3
  L1 (SIG) w10: 861.68,-1140.62 872.08,-1151.02 872.08,-1185.62 877.78,-1191.33 877.78,-1203.76 886.52,-1212.5 U4.6@886.52,-1250.58
DES_LOCK: U1.4 U4.31 | length 762.1
  L1 (SIG) w5: U4.31@886.52,-1518.3 886.52,-1576.05 906.21,-1595.73 1061.62,-1595.73 1119.48,-1537.87 1119.48,-1303.71 1160.63,-1262.56 U1.4@1307.57,-1262.56
DES_R\E\S\E\T\: U1.5 U4.30 | length 788.9
  L1 (SIG) w5: U4.30@866.84,-1518.3 866.84,-1584.82 892.22,-1610.2 1066.67,-1610.2 1129.81,-1547.06 1129.81,-1316.1 1163.66,-1282.24 U1.5@1307.57,-1282.24
DES_SCK: R23.2 U3.33 U4.33 U16.6 | length 1486.7
  L1 (SIG) w5: U4.33@925.89,-1518.3 925.89,-1581.07 v1(926.17,-1581.35) ; v1@1160.61,-2135.62 1222.12,-2074.12 1222.12,-1575.19 v1(1223.78,-1573.53) 1223.78,-1475.54 1237.7,-1461.62 R23.2@1257.32,-1461.62 ; R23.2@1258.35,-1461.25 U16.6@1341.76,-1461.25
  L1 (SIG) w6: U3.33@926.82,-2054.88 926.82,-2134.96 v1(927.23,-2135.38)
  L3 (SIG) w5: v1(926.17,-1581.35) 1213.58,-1581.35 1221.4,-1573.53 v1(1223.78,-1573.53)
  L3 (SIG) w6: v1(927.23,-2135.38) 1159.07,-2135.38 v1(1159.9,-2134.54)
DES_SDA: R22.2 U3.32 U4.32 U16.5 | length 1466.6
  L1 (SIG) w5: v1(1206.06,-1567.56) 1206.06,-1565.18 1210.19,-1561.04 1210.19,-1448.33 R22.2@1215.67,-1442.86
  L1 (SIG) w6: v1(907.13,-2090.62) U3.32@907.13,-2054.88 ; v1(1152.64,-2116.39) 1154.75,-2116.39 1206.06,-2065.08 v1(1206.06,-1567.56) ; R22.2@1215.24,-1442.43 1216.11,-1441.56 U16.5@1341.76,-1441.56
  L1 (SIG) w7: v1(906.21,-1563.76) U4.32@906.21,-1518.3
  L3 (SIG) w6: v1(906.21,-1563.76) 1200.16,-1563.76 1203.95,-1567.56 v1(1206.06,-1567.56) ; v1(907.13,-2090.62) 932.9,-2116.39 v1(1152.64,-2116.39)
DONE: Q3.1 R80.1 U7.P10 | length 1915.8
  L1 (SIG) w10: U7.P10@1562.34,-836.49 v1(1578.09,-852.24)
  L1 (SIG) w12: Q3.1@759.92,-34.55 760.76,-33.72 v1@827.43,-33.72 ; R80.1@760.4,0.64 760.16,0.4 760.16,-31.4 Q3.1@760.74,-31.98
  L6 (SIG) w6: v1(826.57,-34.44) 851.19,-9.82 1582.51,-9.82 1594.13,-21.44 1594.13,-512.64 1585.38,-521.38 1505.16,-521.38 1498.74,-527.8 1498.74,-607.6 1506.89,-615.75 1587.09,-615.75 1593.71,-622.37 1593.71,-836.62 v1(1578.09,-852.24)
EQ_C\D\: R60.1 U1.2 U2.15 | length 1008.9
  L1 (SIG) w6: U2.15@484.95,-1266.07 484.95,-1238 480.34,-1233.39 480.34,-1210.62 480.34,-1163.31 487.09,-1156.56 v1(618.56,-1156.56) ; v1(1265.87,-1223.18) U1.2@1307.57,-1223.19
  L3 (SIG) w6: v1(618.56,-1156.56) 872.99,-1156.56 886.56,-1170.13 959.49,-1170.13 976.87,-1152.75 1250.34,-1152.75 1265.87,-1168.28 v1(1265.87,-1223.18)
EQ_SDO_N: R59.2 U2.10 U4.17 | length 177.2
  L1 (SIG) w4.11: U2.10@572.55,-1353.66 574.76,-1353.66 ccw(c574.76,-1325.52) 594.66,-1345.42 626.11,-1345.42 630.31,-1349.62 728.96,-1349.62 ccw(c734.25,-1349.62) 734.25,-1354.91 U4.17@742.82,-1354.91
EQ_SDO_P: R59.1 U2.11 U4.16 | length 177.2
  L1 (SIG) w4.11: U2.11@572.55,-1328.07 574.76,-1328.07 cw(c574.76,-1356.22) 594.66,-1336.32 629.88,-1336.32 634.08,-1340.52 728.96,-1340.52 cw(c734.25,-1340.52) 734.25,-1335.23 U4.16@742.82,-1335.23
ETH_CLK: R25.2 U10.23 | length 52.5
  L1 (SIG) w10: R25.2@1974.12,-1325.53 1974.26,-1325.68 2026.31,-1325.68 U10.23@2026.46,-1325.82
ETH_COL: U7.T9 U10.29 | length 1172.5
  L1 (SIG) w6.41: v1(1515.1,-915.23) U7.T9@1530.85,-899.48 ; v1(2132.76,-1425.15) U10.29@2132.76,-1373.06
  L3 (SIG) w4.7: v1(1515.1,-915.23) 1530.87,-931 1542.51,-942.64 1542.51,-1025.84 1542.51,-1390.15 1586.13,-1433.77 2124.14,-1433.77 v1(2132.76,-1425.15)
ETH_CRS_DV: U7.U11 U10.27 | length 1002.6
  L1 (SIG) w6.41: v1(1578.65,-1081.4) 1577.65,-1080.4 1577.65,-947.17 U7.U11@1593.84,-930.98 ; v1(2093.39,-1400.15) U10.27@2093.39,-1373.06
  L3 (SIG) w4.7: v1(1578.65,-1081.4) 1578.09,-1081.96 1578.09,-1356.96 1624.64,-1403.5 2047.23,-1403.5 2048.1,-1402.64 2058.08,-1392.65 2085.89,-1392.65 v1(2093.39,-1400.15)
ETH_INT: U7.T18 U10.8 | length 1024.8
  L1 (SIG) w6.41: U7.T18@1814.31,-899.48 v1(1876.81,-899.48) ; U10.8@2219.37,-1207.71 v1(2276.81,-1207.71)
  L3 (SIG) w4.7: v1(1876.81,-899.48) 1914.11,-899.48 1931.16,-899.48 cw(c1931.16,-906.83) 1938.52,-906.83 1938.52,-909.36 ccw(c1945.87,-909.36) 1953.22,-909.36 1953.22,-901.45 cw(c1960.57,-901.45) 1967.92,-901.45 1967.92,-909.36 ccw(c1975.27,-909.36) 1982.62,-909.36 1982.62,-901.45 cw(c1989.97,-901.45) 1997.32,-901.45 1997.32,-909.36 ccw(c2004.67,-909.36) 2012.03,-909.36 2012.03,-901.45 cw(c2019.38,-901.45) 2026.73,-901.45 2026.73,-909.36 ccw(c2034.08,-909.36) 2041.43,-909.36 2041.43,-901.45 cw(c2048.78,-901.45) 2056.13,-901.45 2056.13,-909.36 ccw(c2063.48,-909.36) 2070.83,-909.36 2070.83,-901.45 cw(c2078.18,-901.45) 2085.54,-901.45 2085.54,-909.36 ccw(c2092.89,-909.36) 2100.24,-909.36 2100.24,-901.45 cw(c2107.59,-901.45) 2114.94,-901.45 2114.94,-909.36 ccw(c2122.29,-909.36) 2129.64,-909.36 2129.64,-906.83 cw(c2136.99,-906.83) 2136.99,-899.48 2166.74,-899.48 2241.15,-899.48 2276.81,-935.15 v1(2276.81,-1207.71)
ETH_LINK: R32.1 U7.V15 U10.17 | length 1284.1
  L1 (SIG) w6.41: v1(1719.82,-1040.15) U7.V15@1719.82,-962.48 ; v1(1956.81,-1207.71) U10.17@2026.46,-1207.71 ; R32.1@2349.21,-1218.76 2348.66,-1218.22 2348.66,-1181.69 v1@2351.01,-1179.34
  L3 (SIG) w4.7: v1(1719.82,-1040.15) 1769.86,-1090.19 1771.52,-1091.85 ccw(c1776.72,-1086.65) 1781.92,-1091.85 1807.51,-1066.26 cw(c1812.71,-1071.46) 1817.9,-1066.26 cw(c1812.71,-1071.46) 1817.9,-1076.66 1788.78,-1105.78 ccw(c1793.98,-1110.98) 1788.78,-1116.18 ccw(c1793.98,-1110.98) 1799.18,-1116.18 1828.3,-1087.05 cw(c1833.5,-1092.25) 1838.7,-1087.05 cw(c1833.5,-1092.25) 1838.7,-1097.45 1809.57,-1126.57 ccw(c1814.77,-1131.77) 1809.57,-1136.97 ccw(c1814.77,-1131.77) 1819.97,-1136.97 1849.09,-1107.84 cw(c1854.29,-1113.04) 1859.49,-1107.84 cw(c1854.29,-1113.04) 1859.49,-1118.24 1830.36,-1147.37 ccw(c1835.56,-1152.56) 1830.36,-1157.76 ccw(c1835.56,-1152.56) 1840.76,-1157.76 1869.88,-1128.64 cw(c1875.08,-1133.83) 1880.28,-1128.64 cw(c1875.08,-1133.83) 1880.28,-1139.03 1854.69,-1164.62 ccw(c1859.89,-1169.82) 1854.69,-1175.02 1882.04,-1202.36 1887.38,-1207.71 v1(1956.81,-1207.71)
  L6 (SIG) w4.7: v1(1956.81,-1207.71) 2233.19,-1207.71 2260.38,-1180.52 v1(2348.66,-1180.52)
ETH_MDC: U7.T13 U10.20 | length 954.6
  L1 (SIG) w6.41: U7.T13@1656.83,-899.48 1657.6,-899.48 1671.8,-913.69 v1(1672.58,-913.69) ; v1(1971.81,-1266.76) U10.20@2026.46,-1266.76
  L3 (SIG) w4.7: v1(1672.58,-913.69) 1672.58,-915.23 1656.68,-931.13 1656.68,-991.49 1672.58,-1007.39 1672.58,-1163.54 1672.58,-1167.15 1685.57,-1180.14 cw(c1680.37,-1185.34) 1685.57,-1190.54 1661.9,-1214.2 ccw(c1667.1,-1219.4) 1661.9,-1224.6 ccw(c1667.1,-1219.4) 1672.3,-1224.6 1699.5,-1197.4 cw(c1704.7,-1202.59) 1709.9,-1197.4 cw(c1704.7,-1202.59) 1709.9,-1207.79 1682.69,-1234.99 ccw(c1687.89,-1240.19) 1682.69,-1245.39 ccw(c1687.89,-1240.19) 1693.09,-1245.39 1720.29,-1218.19 cw(c1725.49,-1223.39) 1730.69,-1218.19 cw(c1725.49,-1223.39) 1730.69,-1228.58 1703.49,-1255.79 ccw(c1708.68,-1260.98) 1703.49,-1266.18 ccw(c1708.68,-1260.98) 1713.88,-1266.18 1737.55,-1242.51 cw(c1742.75,-1247.71) 1747.94,-1242.51 1749.61,-1244.18 1772.19,-1266.76 v1(1971.81,-1266.76)
ETH_MDIO: U7.V14 U10.19 | length 946.1
  L1 (SIG) w6.41: v1(1688.33,-1040.15) U7.V14@1688.33,-962.48 ; v1(1956.81,-1247.08) U10.19@2026.46,-1247.08
  L3 (SIG) w4.7: v1(1688.33,-1040.15) 1688.33,-1119.76 1688.33,-1125.58 1694.46,-1131.72 ccw(c1699.66,-1126.52) 1704.86,-1131.72 1712.71,-1123.88 cw(c1717.9,-1129.07) 1723.1,-1123.88 cw(c1717.9,-1129.07) 1723.1,-1134.27 1700.69,-1156.68 ccw(c1705.89,-1161.88) 1700.69,-1167.08 ccw(c1705.89,-1161.88) 1711.09,-1167.08 1733.5,-1144.67 cw(c1738.7,-1149.86) 1743.89,-1144.67 cw(c1738.7,-1149.86) 1743.89,-1155.06 1721.48,-1177.47 ccw(c1726.68,-1182.67) 1721.48,-1187.87 ccw(c1726.68,-1182.67) 1731.88,-1187.87 1754.29,-1165.46 cw(c1759.49,-1170.66) 1764.69,-1165.46 cw(c1759.49,-1170.66) 1764.69,-1175.85 1742.28,-1198.26 ccw(c1747.47,-1203.46) 1742.28,-1208.66 ccw(c1747.47,-1203.46) 1752.67,-1208.66 1775.08,-1186.25 cw(c1780.28,-1191.45) 1785.48,-1186.25 cw(c1780.28,-1191.45) 1785.48,-1196.65 1763.07,-1219.06 ccw(c1768.27,-1224.25) 1763.07,-1229.45 ccw(c1768.27,-1224.25) 1773.46,-1229.45 1795.87,-1207.04 cw(c1801.07,-1212.24) 1806.27,-1207.04 cw(c1801.07,-1212.24) 1806.27,-1217.44 1783.86,-1239.85 ccw(c1789.06,-1245.05) 1783.86,-1250.24 ccw(c1789.06,-1245.05) 1794.26,-1250.24 1798.42,-1246.08 cw(c1803.62,-1251.27) 1808.82,-1246.08 1809.82,-1247.08 1811.14,-1247.08 v1(1956.81,-1247.08)
ETH_RST: U7.U14 U10.18 | length 889.6
  L1 (SIG) w6.41: U7.U14@1688.33,-930.98 1704.07,-946.73 v1(1704.07,-1015.15) ; v1(1971.81,-1227.39) U10.18@2026.46,-1227.39
  L3 (SIG) w4.7: v1(1704.07,-1015.15) 1704.07,-1058.26 1704.07,-1086.18 1707.92,-1090.02 ccw(c1713.12,-1084.82) 1718.31,-1090.02 1730.29,-1078.04 cw(c1735.49,-1083.24) 1740.69,-1078.04 cw(c1735.49,-1083.24) 1740.69,-1088.44 1725.17,-1103.95 ccw(c1730.37,-1109.15) 1725.17,-1114.35 ccw(c1730.37,-1109.15) 1735.57,-1114.35 1751.09,-1098.83 cw(c1756.28,-1104.03) 1761.48,-1098.83 cw(c1756.28,-1104.03) 1761.48,-1109.23 1745.97,-1124.74 ccw(c1751.16,-1129.94) 1745.97,-1135.14 ccw(c1751.16,-1129.94) 1756.36,-1135.14 1771.05,-1120.45 cw(c1776.25,-1125.65) 1781.45,-1120.45 cw(c1776.25,-1125.65) 1781.45,-1130.84 1766.76,-1145.54 ccw(c1771.96,-1150.73) 1766.76,-1155.93 ccw(c1771.96,-1150.73) 1777.15,-1155.93 1791.85,-1141.24 cw(c1797.04,-1146.44) 1802.24,-1141.24 cw(c1797.04,-1146.44) 1802.24,-1151.64 1787.55,-1166.33 ccw(c1792.75,-1171.53) 1787.55,-1176.72 ccw(c1792.75,-1171.53) 1797.95,-1176.72 1812.64,-1162.03 cw(c1817.84,-1167.23) 1823.03,-1162.03 cw(c1817.84,-1167.23) 1823.03,-1172.43 1808.34,-1187.12 ccw(c1813.54,-1192.32) 1808.34,-1197.52 ccw(c1813.54,-1192.32) 1818.74,-1197.52 1834.25,-1182 cw(c1839.45,-1187.2) 1844.65,-1182 cw(c1839.45,-1187.2) 1844.65,-1192.4 1832.67,-1204.38 ccw(c1837.87,-1209.57) 1832.67,-1214.77 1844.73,-1226.83 1845.29,-1227.39 v1(1971.81,-1227.39)
ETH_RX_D0: U7.U12 U10.30 | length 1040
  L1 (SIG) w6.41: v1(1610.14,-1081.4) 1609.59,-1080.84 1609.59,-946.73 U7.U12@1625.33,-930.98 ; v1(2152.44,-1410.15) U10.30@2152.44,-1373.06
  L3 (SIG) w4.7: v1(1610.14,-1081.4) 1609.59,-1081.96 1609.59,-1315.24 1639.49,-1345.15 2111.41,-1345.15 2137.74,-1345.15 2152.44,-1359.85 v1(2152.44,-1410.15)
ETH_RX_D1: U7.V12 U10.31 | length 1035.8
  L1 (SIG) w6.41: U7.V12@1625.33,-962.48 1625.61,-962.75 1625.61,-1056.12 v1(1625.89,-1056.4) ; v1(2171.81,-1425.15) 2171.97,-1424.99 2171.97,-1373.22 U10.31@2172.13,-1373.06
  L3 (SIG) w4.7: v1(1625.89,-1056.4) 1625.33,-1056.96 1625.33,-1290.75 1659.74,-1325.15 2143.93,-1325.15 2161.81,-1325.15 2171.81,-1335.15 v1(2171.81,-1425.15)
ETH_RX_D2: U7.U13 U10.32 | length 1063.8
  L1 (SIG) w6.41: v1(1641.64,-1081.4) 1641.08,-1080.84 1641.08,-946.73 U7.U13@1656.83,-930.98 ; v1(2191.81,-1425.15) U10.32@2191.81,-1373.06
  L3 (SIG) w4.7: v1(1641.64,-1081.4) 1641.08,-1081.96 1641.08,-1264.42 1681.62,-1304.96 2150.34,-1304.96 2163.7,-1304.96 2191.81,-1333.06 v1(2191.81,-1425.15)